# EAGLE board RAC (EAGLE 7.6.0)
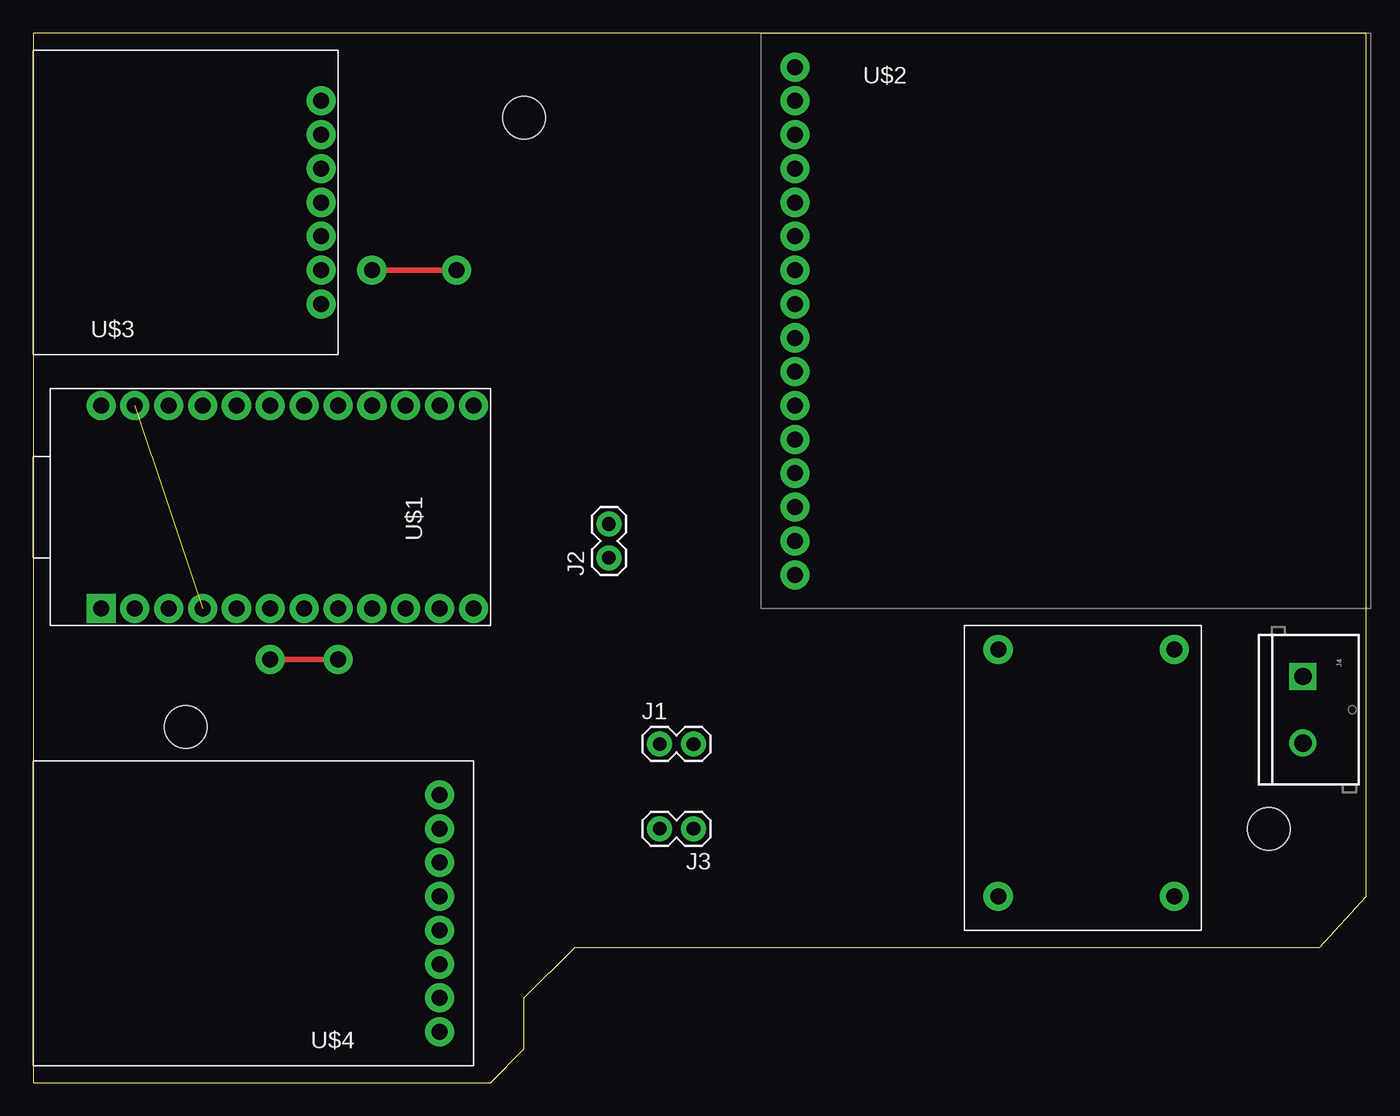
[diagram p0: board, top side]
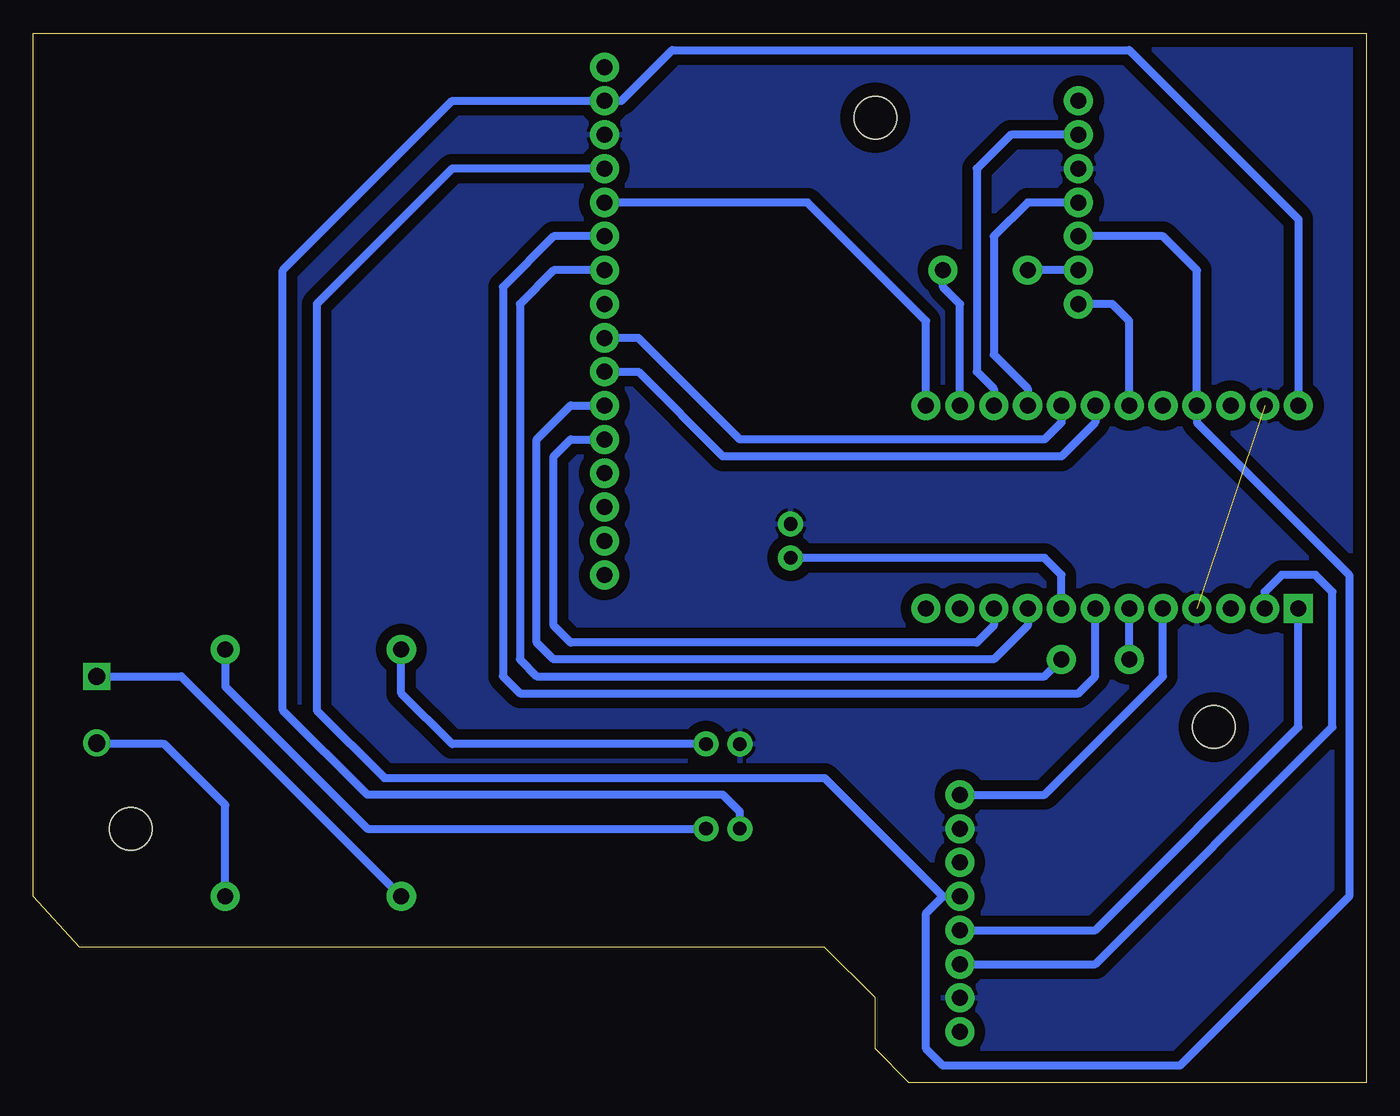
[diagram p1: board, bottom side, seen from below]

Size 100 x 78.73 mm. Coordinates in mm from the lower left corner, seen from the top.
Outline: 0,0 34.29,0 36.83,2.54 36.83,6.35 40.64,10.16 96.52,10.16 100,13.97 100,78.73 0,78.73 0,0
Copper layers (1*16): Top 0.035mm / dielectric 1.5mm / Bottom 0.035mm
Design rules "default *": minimum track width 10mil, minimum drill 24mil, track to track 0.8mm, track to pad 0.8mm, pad to pad 8mil, via to via 8mil, smd to smd 8mil, copper to edge 40mil, drill to drill 8mil, minimum pad ring 10mil, minimum via ring 8mil, stop-mask expansion 4mil, vias tented up to drill 0mil, thermal gap 10mil
Holes 3.2 mm at 92.71,19.05 36.83,72.39 11.43,26.67

## Footprints (pad centres in the part's own frame; a part is rotated, then mirrored left to right if it is on the bottom)
1X02 = drill 1.016 pad 1.88: 1 0,0; 2 2.54,0
SCREWTERMINAL-5MM-2 = drill 1.3 pad 2.032 square: 1 0,0 | drill 1.3 pad 2.032: 2 5,0
MINI = drill 1.2 pad 2.184: 0 -7.62,10.16; 2 -7.62,2.54; 3 -7.62,0; 4 -7.62,-2.54; 5 -7.62,-5.08; 6 -7.62,-7.62; 7 -7.62,-10.16; 8 -7.62,-12.7; 9 -7.62,-15.24; 10 7.62,-15.24; 11 7.62,-12.7; 12 7.62,-10.16; 13 7.62,-7.62; 14 7.62,-5.08; 15 7.62,-2.54; 16 7.62,0; 17 7.62,2.54; AREF 7.62,7.62; GND 7.62,10.16; GND1 -7.62,5.08; RST -7.62,7.62; VCC 7.62,5.08; VIN 7.62,12.7 | drill 1.2 pad 2.184 square: 1 -7.62,12.7
FONA = drill 1.2 pad 2.184: 5V -12.7,26.67; BAT -12.7,24.13; GND -12.7,21.59; KEY -12.7,6.35; MIC+ -12.7,-3.81; MIC- -12.7,-6.35; NS -12.7,-1.27; PS -12.7,1.27; RI -12.7,3.81; RST -12.7,16.51; RTS -12.7,8.89; RX -12.7,13.97; SPKR+ -12.7,-8.89; SPKR- -12.7,-11.43; TX -12.7,11.43; VIO -12.7,19.05
SD_BR = drill 1.2 pad 2.184: CD -5.08,-5.08; CS -5.08,10.16; DI -5.08,7.62; DO -5.08,-2.54; GND -5.08,0; SCK -5.08,2.54; VCC -5.08,5.08
BLE = drill 1.2 pad 2.184: CTS -3.81,7.62; DFU -3.81,-7.62; GND -3.81,-5.08; MOD -3.81,10.16; RTS -3.81,-2.54; RX -3.81,2.54; TX -3.81,5.08; VIN -3.81,0
DC-DC = drill 1.2 pad 2.184: IN+ -8.89,-6.858; IN- -8.89,6.35; OUT+ 9.652,-6.858; OUT- 9.652,6.35

## Placement (x,y rotation side)
J1  [1X02]  46.99,25.4 0 top
J2  [1X02]  43.18,39.37 90 top
J3  [1X02]  49.53,19.05 180 top
J4  [SCREWTERMINAL-5MM-2]  95.25,30.48 270 top
U$1  SAMD_21'A'  [MINI]  17.78,43.18 90 top
U$2  FONA808'A'  [FONA]  69.85,49.53 0 top
U$3  SD'A'  [SD_BR]  16.51,68.58 180 top
U$4  BT_UART'A'  [BLE]  26.67,13.97 180 top
U$5  DC-DC'A'  [DC-DC]  78.74,22.86 90 top

## Library data of the parts
J1-J3 = SparkFun-Connectors
J4 = SparkFun-Connectors; STOREFRONT_ID: PRT-08432
U$1-U$5 = rac

## Nets
GND: J1.1 J2.2 U$1.GND U$1.GND1 U$2.GND U$3.GND U$4.CTS U$4.GND
N$1: J3.2 U$1.VIN U$2.BAT
N$2: U$1.4 U$2.RX
N$3: U$1.3 U$2.TX
N$4: U$1.VCC U$2.VIO U$3.VCC U$4.VIN
N$5: U$1.14 U$2.KEY
N$6: U$1.15 U$2.RI
N$7: U$1.10 U$2.RST
N$10: U$1.11 U$3.DI
N$11: U$1.12 U$3.DO
N$12: U$1.13 U$3.SCK
N$13: U$1.16 U$3.CS
N$18: U$1.0 U$4.TX
N$19: U$1.2 U$4.DFU
N$20: J3.1 U$5.OUT+
N$21: J1.2 U$5.OUT-
N$22: J4.2 U$5.IN+
N$23: J4.1 U$5.IN-
S$1: J2.1 U$1.5
S$2: U$1.6 U$2.PS
S$3: U$1.7 U$2.NS
S$4: U$1.1 U$4.RX

## Tracks (layer width: path | path; a pad name or v marks a point on that pad's centre or on a via)
GND  (1 unrouted)
  pour Bottom: 0,78.74 100.33,78.74 100.33,0 0,0
N$1
  Bottom 0.61: U$1.VIN 5.08,64.77 17.78,77.47 52.07,77.47 55.88,73.66 U$2.BAT 68.58,73.66 81.28,60.96 81.28,27.94 74.93,21.59 48.26,21.59 46.99,20.32 J3.2
N$2
  Bottom 0.61: U$2.RX 60.96,63.5 64.77,59.69 64.77,30.48 63.5,29.21 21.59,29.21 20.32,30.48 U$1.4
N$3  (via drill 1.2 pad 2.18)
  Top 0.406: v22.86,31.75 v17.78,31.75
  Bottom 0.61: U$2.TX 60.96,60.96 63.5,58.42 63.5,31.75 62.23,30.48 24.13,30.48 v22.86,31.75 | v17.78,31.75 U$1.3
N$4
  Bottom 0.61: U$3.VCC 15.24,63.5 12.7,60.96 U$1.VCC 12.7,49.53 1.27,38.1 1.27,13.97 13.97,1.27 31.75,1.27 33.02,2.54 33.02,12.7 31.75,13.97 | 31.75,13.97 U$4.VIN | U$2.VIO 68.58,68.58 78.74,58.42 78.74,27.94 73.66,22.86 40.64,22.86 31.75,13.97
N$5
  Bottom 0.61: U$1.14 22.86,49.53 24.13,48.26 46.99,48.26 54.61,55.88 U$2.KEY
N$6
  Bottom 0.61: U$2.RI 54.61,53.34 48.26,46.99 22.86,46.99 20.32,49.53 U$1.15
N$7
  Bottom 0.61: U$1.10 33.02,57.15 41.91,66.04 U$2.RST
N$10  (via drill 1.2 pad 2.18)
  Top 0.406: v25.4,60.96 v31.75,60.96
  Bottom 0.61: U$3.DI v25.4,60.96 | U$1.11 30.48,58.42 31.75,59.69 v31.75,60.96
N$11
  Bottom 0.61: U$3.DO 26.67,71.12 29.21,68.58 29.21,53.34 27.94,52.07 U$1.12
N$12
  Bottom 0.61: U$3.SCK 25.4,66.04 27.94,63.5 27.94,54.61 25.4,52.07 U$1.13
N$13
  Bottom 0.61: U$1.16 17.78,57.15 19.05,58.42 U$3.CS
N$18
  Bottom 0.61: U$4.TX 20.32,8.89 2.54,26.67 2.54,36.83 3.81,38.1 6.35,38.1 7.62,36.83 U$1.0
N$19
  Bottom 0.61: U$4.DFU 24.13,21.59 15.24,30.48 U$1.2
N$20
  Bottom 0.61: U$5.OUT+ 85.6,29.72 74.93,19.05 J3.1
N$21
  Bottom 0.61: J1.2 68.58,25.4 72.39,29.21 U$5.OUT-
N$22
  Bottom 0.406: 95.17,25.4 J4.2
  Bottom 0.61: U$5.IN+ 85.6,20.83 90.17,25.4 95.17,25.4
N$23
  Bottom 0.61: J4.1 88.9,30.48 U$5.IN-
S$1
  Bottom 0.61: U$1.5 22.86,38.1 24.13,39.37 J2.1
S$2
  Bottom 0.61: U$1.6 25.4,34.29 27.94,31.75 60.96,31.75 62.23,33.02 62.23,48.26 59.69,50.8 U$2.PS
S$3
  Bottom 0.61: U$1.7 27.94,34.29 29.21,33.02 59.69,33.02 60.96,34.29 60.96,46.99 59.69,48.26 U$2.NS
S$4
  Bottom 0.61: U$4.RX 20.32,11.43 5.08,26.67 U$1.1